# Altium PCB BEAGLEPLAYV020_220915.brd.PcbDoc (part 9 of 12)
Units mil, origin at the board's own origin, x right, y up, seen from the top; angles counter-clockwise.
Board outline 3149.7 x 3149.7 mil, 8 copper layers (TOP, LYR2_GND, LYR3, LAY4_PWR1, LAY5_PWR2, LAY6, LYR7_GND, BOTTOM), stack 60.84 mil thick; 782 components, 546 nets, 2864 pads, 2056 vias.
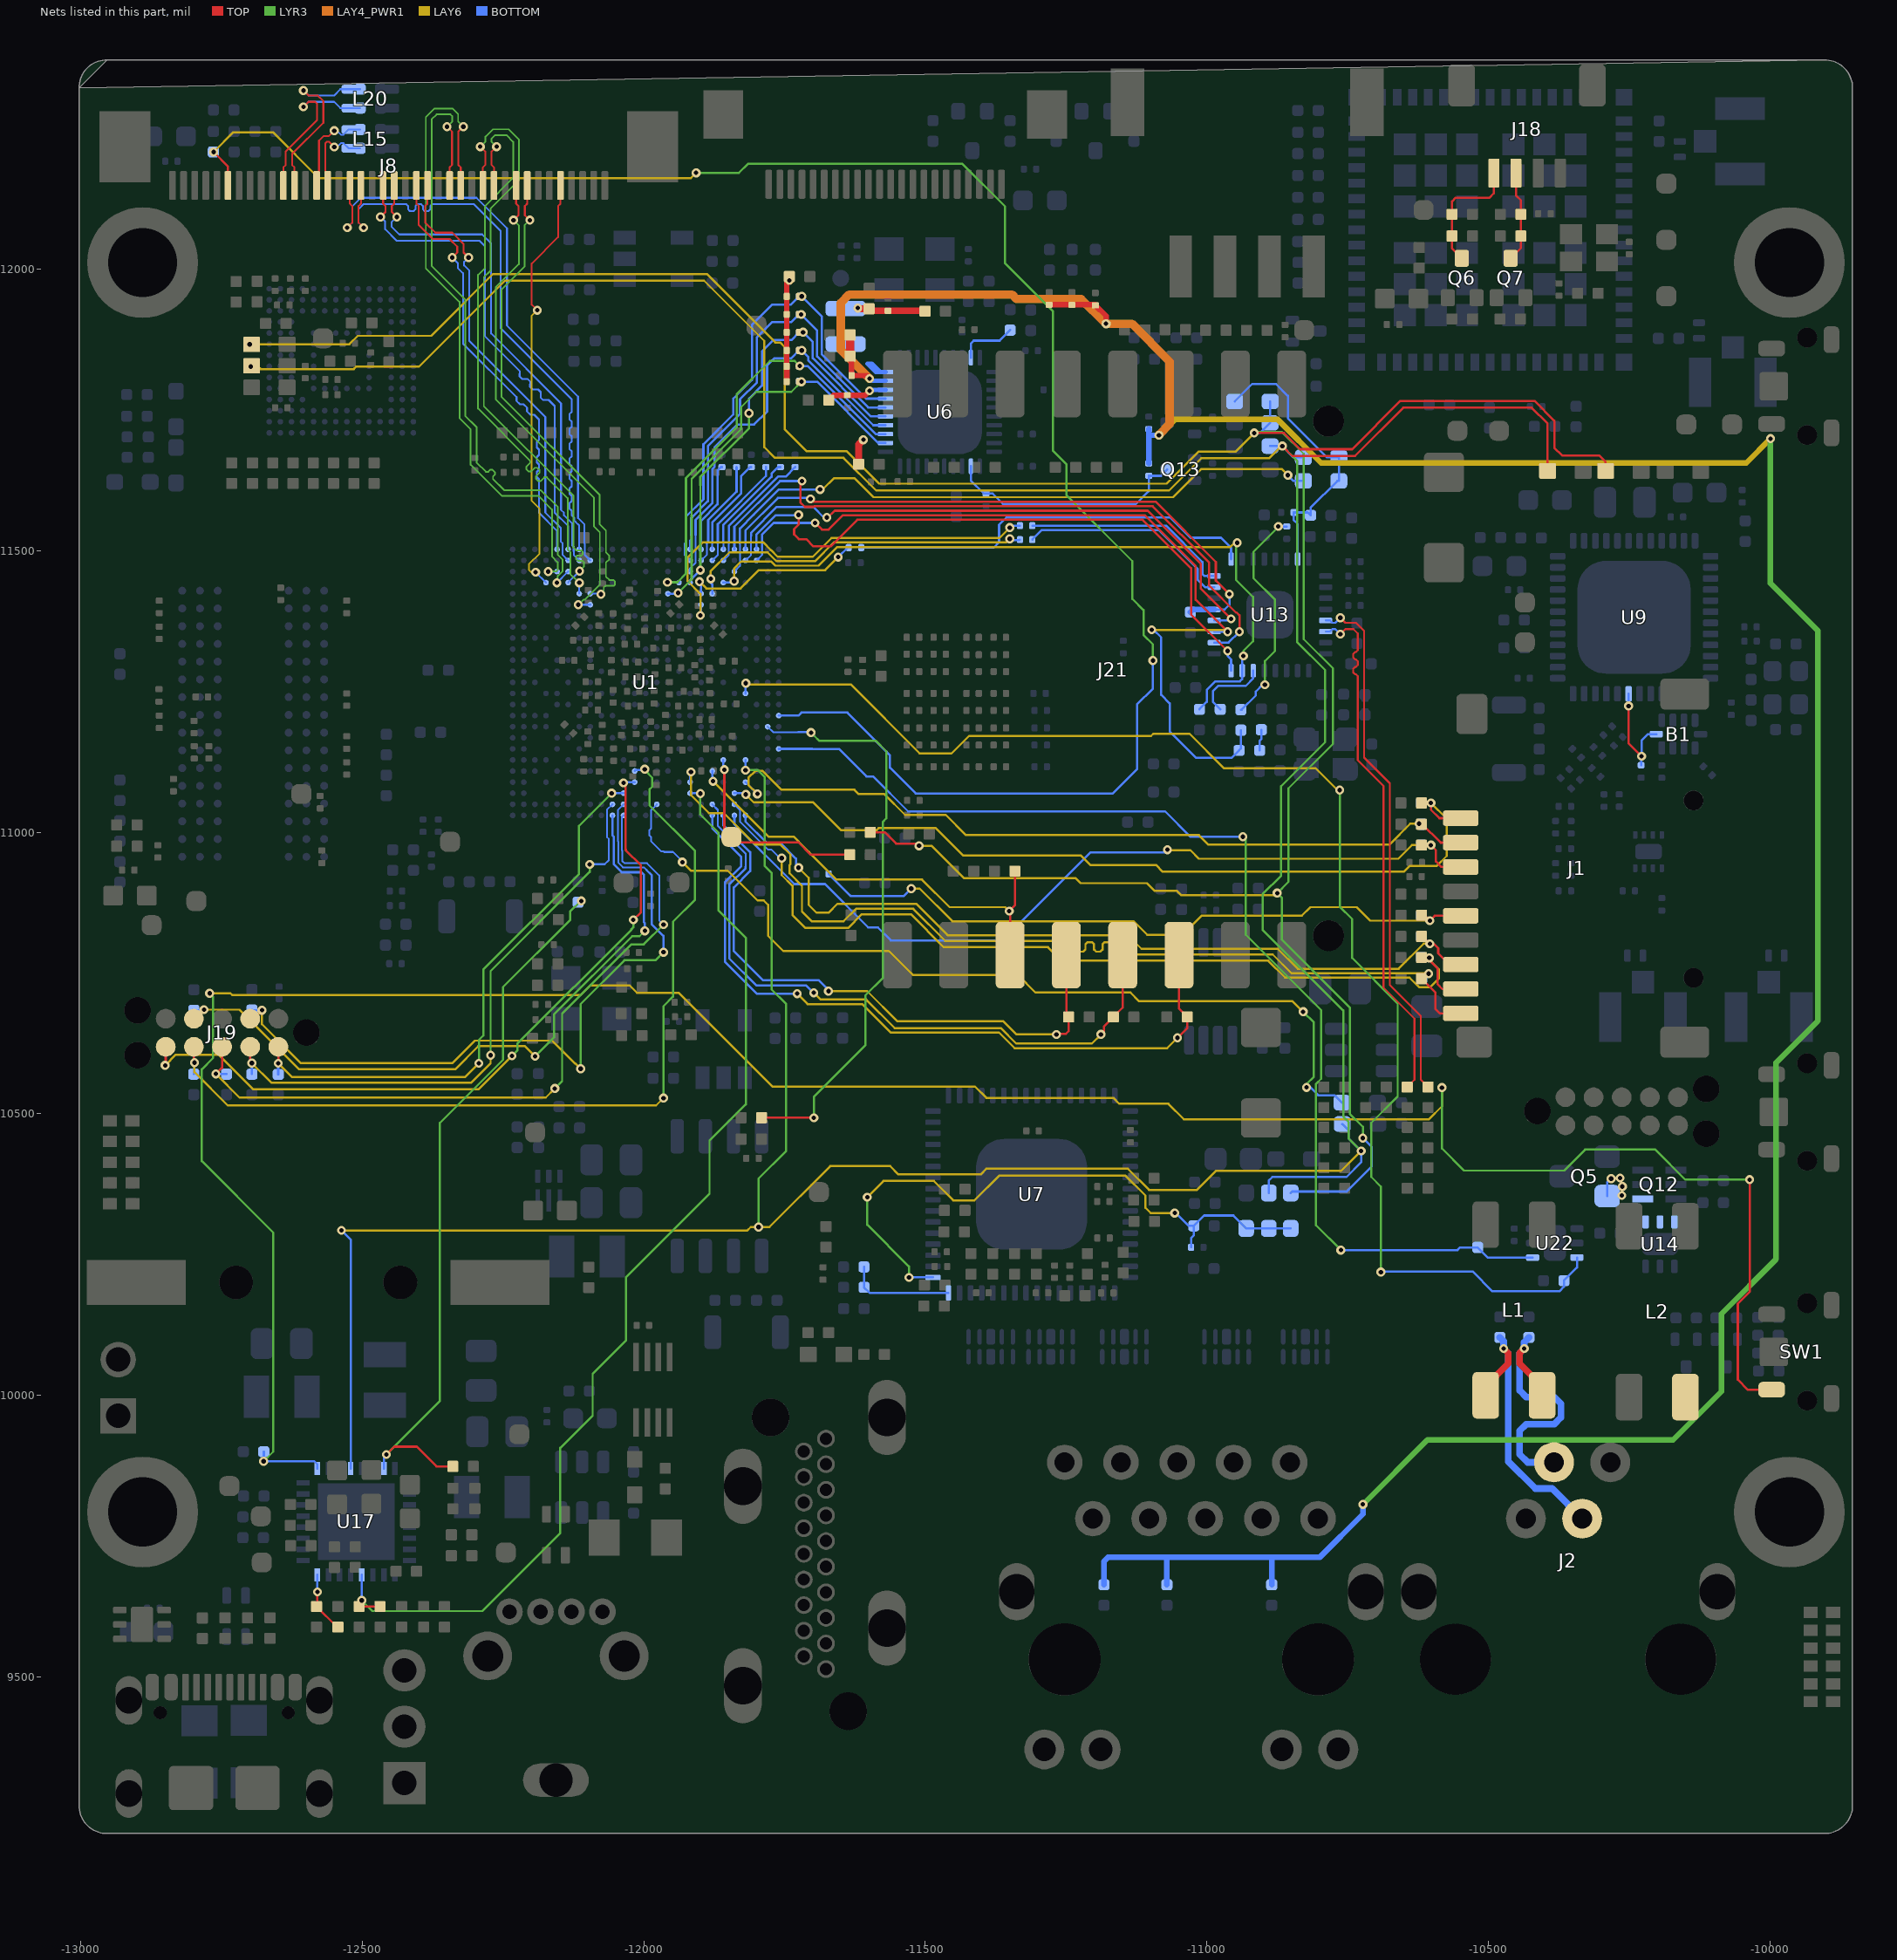
[diagram p15: the nets of this part, all layers, seen from the top]

## Via types
v1: diameter 16/0/16/0/0/0/0/16 (per signal layer), hole 8, TOP to BOTTOM, 334 vias
v2: diameter 16/16/0/0/0/0/16/16 (per signal layer), hole 8, TOP to BOTTOM, 282 vias
v3: diameter 16/0/0/0/0/16/0/16 (per signal layer), hole 8, TOP to BOTTOM, 255 vias
v4: diameter 16/16/0/0/0/16/16/16 (per signal layer), hole 8, TOP to BOTTOM, 253 vias
v5: diameter 16, hole 8, TOP to BOTTOM, 212 vias
v6: diameter 16/16/16/0/0/16/16/16 (per signal layer), hole 8, TOP to BOTTOM, 173 vias
v7: diameter 16/0/0/16/0/0/0/16 (per signal layer), hole 8, TOP to BOTTOM, 131 vias
v8: diameter 16/0/0/0/16/0/0/16 (per signal layer), hole 8, TOP to BOTTOM, 98 vias
v9: diameter 16/16/0/16/0/0/16/16 (per signal layer), hole 8, TOP to BOTTOM, 93 vias
v10: diameter 16/0/16/0/0/16/0/16 (per signal layer), hole 8, TOP to BOTTOM, 87 vias
v11: diameter 16/16/0/16/0/16/16/16 (per signal layer), hole 8, TOP to BOTTOM, 44 vias
v12: diameter 16/16/16/16/0/16/16/16 (per signal layer), hole 8, TOP to BOTTOM, 40 vias
v13: diameter 16/16/16/0/0/0/16/16 (per signal layer), hole 8, TOP to BOTTOM, 19 vias
v14: diameter 16/0/0/16/0/16/0/16 (per signal layer), hole 8, TOP to BOTTOM, 15 vias
v15: diameter 16/0/0/0/16/16/0/16 (per signal layer), hole 8, TOP to BOTTOM, 13 vias
v16: diameter 16/0/16/0/16/0/0/16 (per signal layer), hole 8, TOP to BOTTOM, 3 vias
v17: diameter 16/0/16/16/0/0/0/16 (per signal layer), hole 8, TOP to BOTTOM, 3 vias
v18: diameter 16/16/16/16/0/0/16/16 (per signal layer), hole 8, TOP to BOTTOM, 1 vias

## Nets (pads, with @x,y where several pads share a name; then routed paths per layer and width w, separated by ;. In a path a pad name is that pad's centre, name@x,y a point inside that pad or via, vN(x,y) a via of type N, cw(c..) or ccw(c..) an arc to the next point about the centre after c; other vN are vias at no path point) (continued)
OLDI0_A1_P: J8.5 U1.AB4 | length 765.3
  TOP w3.3: v3(-12189.15,11927.13) -12199,11936.98 -12199,12010 -12152.08,12056.92 -12152.08,12112.11 -12147.88,12116.31 J8.5@-12147.88,12148.55
  LAY6 w3: v3(-12192,11461.7) -12199.7,11461.7 -12204,11466 -12204,11475.95 -12185,11494.95 -12185,11574.7 -12199,11588.7 -12199,11917.28 v3(-12189.15,11927.13)
  BOTTOM w3.2: v3(-12192,11461.7) U1.AB4@-12173.66,11443.36
OLDI0_A2_N: J8.9 U1.Y8 | length 886.2
  TOP w3.3: v1(-12231.28,12086.95) -12222.43,12095.8 -12222.43,12112.12 -12226.62,12116.31 J8.9@-12226.62,12148.55
  LYR3 w3: v1(-12231.28,12086.95) -12221.93,12077.6 -12221.93,12008.64 -12263,11967.57 -12263,11769.13 -12088.49,11594.62 -12088.49,11543.18 -12078,11532.69 -12078,11439.7 -12104.86,11412.84 -12107.46,11412.84 v1(-12116.3,11404)
  BOTTOM w3.3: v1(-12116.3,11404) U1.Y8@-12094.92,11404
OLDI0_A2_P: J8.8 U1.AA8 | length 883.1
  TOP w3.3: J8.8@-12206.94,12148.55 -12206.94,12116.31 -12211.13,12112.12 -12211.13,12095.8 v1(-12202.28,12086.95)
  LYR3 w3: v1(-12202.28,12086.95) -12211.63,12077.6 -12211.63,12004.37 -12252.7,11963.3 -12252.7,11773.4 -12078.19,11598.89 -12078.19,11546.89 -12067.16,11535.86 -12067.16,11497 -12061.16,11491 -12061.16,11485 -12067.16,11479 -12067.16,11454 -12061.16,11448 -12054.12,11448 -12051.12,11445 -12051.12,11439.88 -12053.25,11437.75 -12068.25,11437.75 -12071,11435 -12071,11427.7 v1(-12076,11422.7)
  BOTTOM w3.3: U1.AA8@-12094.92,11423.68 -12076.98,11423.68 v1(-12076,11422.7)
OLDI0_A3_N: J8.12 U1.AB6 | length 1089.6
  TOP w3.3: v1(-12290.34,12217.56) -12281.49,12208.71 -12281.49,12184.99 -12285.68,12180.8 J8.12@-12285.68,12148.55
  LYR3 w3: v1(-12290.34,12217.56) -12280.99,12226.91 -12280.99,12235.43 -12268.12,12248.3 -12239.73,12248.3 -12221.7,12230.27 -12221.7,12157.73 -12271.7,12107.73 -12271.7,11997.73 -12284,11985.43 -12284,11756.71 -12124.81,11597.52 -12124.81,11505.51 -12120,11500.7 -12111.2,11500.7 -12108.87,11498.37 -12108.87,11493.37 -12111,11491.24 -12118,11491.24 -12120,11489.24 -12120,11484.99 -12117.01,11482 -12109,11482 -12106,11479 -12106,11472 -12113.98,11464.02 v1(-12113.98,11463.68)
  BOTTOM w3.3: U1.AB6@-12134.3,11443.36 v1(-12113.98,11463.68)
OLDI0_A3_P: J8.11 U1.AA7 | length 1090.1
  TOP w3.3: J8.11@-12265.99,12148.55 -12265.99,12180.79 -12270.19,12184.99 -12270.19,12208.71 v1(-12261.34,12217.56)
  LYR3 w3: v1(-12261.34,12217.56) -12270.69,12226.91 -12270.69,12231.16 -12263.85,12238 -12244,12238 -12232,12226 -12232,12162 -12282,12112 -12282,12002 -12294.3,11989.7 -12294.3,11752.44 -12201.89,11660.03 -12201.89,11655.79 -12208.72,11648.96 -12208.72,11644.72 -12204.47,11640.47 -12200.23,11640.47 -12193.4,11647.3 -12189.16,11647.3 -12184.91,11643.05 -12184.91,11638.81 -12191.74,11631.98 -12191.74,11627.74 -12187.49,11623.49 -12183.25,11623.49 -12176.42,11630.32 -12172.18,11630.32 -12135.11,11593.25 -12135.11,11502.12 -12130,11497.01 -12130,11457.7 -12124.22,11451.92 -12123.35,11451.92 v1(-12114.51,11443.08)
  BOTTOM w3.3: U1.AA7@-12114.61,11423.68 -12114.61,11442.98 v1(-12114.51,11443.08)
OLDI0_A4_N: J8.15 U1.AC6 | length 1177.9
  TOP w3.3: v1(-12349.39,12253) -12340.54,12244.15 -12340.54,12184.98 -12344.73,12180.79 J8.15@-12344.73,12148.55
  LYR3 w3: v1(-12349.39,12253) -12340.04,12262.35 -12340.04,12271.47 -12343.27,12274.7 -12367.74,12274.7 -12376.7,12265.74 -12376.7,12005.7 -12317,11946 -12317,11739.7 -12297,11719.7 -12297,11656.7 -12280.45,11640.15 -12276.21,11640.15 -12272.8,11643.56 -12268.56,11643.56 -12264.31,11639.31 -12264.31,11635.07 -12267.72,11631.66 -12267.72,11627.42 -12248,11607.7 -12182.99,11607.7 -12152.7,11577.41 -12152.7,11492.69 -12144,11483.99 -12144,11463.7 -12150,11457.7 -12152.65,11455.68 v1(-12154.33,11443.02)
  BOTTOM w3.3: v1(-12154.33,11443.02) U1.AC6@-12134.3,11463.05
OLDI0_A4_P: J8.14 U1.AC5 | length 1176.8
  TOP w3.3: J8.14@-12325.05,12148.55 -12325.05,12180.79 -12329.24,12184.98 -12329.24,12244.15 v1(-12320.39,12253)
  LYR3 w3: v1(-12320.39,12253) -12329.74,12262.35 -12329.74,12275.74 -12339,12285 -12372.01,12285 -12387,12270.01 -12387,12001.43 -12327.3,11941.73 -12327.3,11735.43 -12307.3,11715.43 -12307.3,11652.43 -12252.27,11597.4 -12187.26,11597.4 -12163,11573.14 -12163,11489.7 -12152.79,11479.49 -12152.79,11465.69 -12155.43,11463.05 v1(-12169.65,11463.05)
  BOTTOM w3.3: v1(-12169.65,11463.05) U1.AC5@-12153.98,11463.05
OLDI0_A5_N: J8.18 U1.AE5 | length 792.1
  TOP w3.3: J8.18@-12403.79,12148.55 -12403.79,12116.3 -12399.6,12112.11 -12399.6,12078.31 -12374.69,12053.4 -12344.69,12053.4 -12331.3,12040.01 -12331.3,12029.55 v5(-12340.15,12020.7)
  BOTTOM w3.2: -12186.06,11579.44 -12186.06,11578.69 -12186.01,11578.64 -12186.01,11574.78 -12185.96,11574.73 -12185.96,11567.22 -12153.99,11535.25 -12153.99,11515.24 ; U1.AE5@-12153.98,11502.42 -12153.98,11515.22
  BOTTOM w3.3: v5(-12340.15,12020.7) -12330.3,12010.85 -12330.3,12002.01 -12321,11992.71 -12321,11867.7 -12225.98,11772.68 -12225.98,11765.98 -12219.99,11759.99 -12213.29,11759.99 -12207.3,11754 -12207.3,11747.3 -12201.31,11741.31 -12194.61,11741.31 -12186.06,11732.76 -12186.06,11696.6 -12190,11692.66 -12190,11683.4 -12186.06,11679.46 -12186.06,11670.2 -12190,11666.26 -12190,11657 -12186.06,11653.06 -12186.06,11643.8 -12190,11639.86 -12190,11630.6 -12186.06,11626.66 -12186.06,11579.44
OLDI0_A5_P: J8.17 U1.AD6 | length 796.8
  TOP w3.3: J8.17@-12384.1,12148.55 -12384.1,12116.31 -12388.3,12112.11 -12388.3,12083 -12370,12064.7 -12340,12064.7 -12320,12044.7 -12320,12029.55 v5(-12311.15,12020.7)
  BOTTOM w3.2: -12174.76,11579.44 -12174.76,11567.75 -12147,11539.99 -12147,11515.91 -12144.1,11513.01 -12144.1,11492.54 U1.AD6@-12134.3,11482.74
  BOTTOM w3.3: v5(-12311.15,12020.7) -12319,12012.85 -12319,12006.7 -12309.7,11997.4 -12309.7,11872.39 -12174.76,11737.45 -12174.76,11579.44
OLDI0_A6_N: J8.21 U1.AE6 | length 893.7
  TOP w3.3: v5(-12467.5,12092.6) -12458.65,12101.45 -12458.65,12112.12 -12462.84,12116.31 J8.21@-12462.84,12148.55
  BOTTOM w3.2: -12158.18,11580.95 -12158.18,11580.2 -12158.13,11580.15 -12158.13,11576.29 -12158.08,11576.24 -12158.08,11567.78 -12134.3,11544 U1.AE6@-12134.3,11502.42
  BOTTOM w3.3: v5(-12467.5,12092.6) -12459.3,12084.4 -12459.3,12071.01 -12438.69,12050.4 -12291.69,12050.4 -12282.3,12041.01 -12282.3,11881.01 -12220.37,11819.08 -12220.37,11814.42 -12220.57,11814.22 -12220.57,11809.56 -12215.89,11804.88 -12211.23,11804.88 -12211.03,11805.08 -12206.37,11805.08 -12201.69,11800.4 -12201.69,11795.74 -12201.89,11795.54 -12201.89,11790.88 -12197.21,11786.2 -12192.55,11786.2 -12192.35,11786.4 -12187.69,11786.4 -12183.01,11781.72 -12183.01,11777.06 -12183.21,11776.86 -12183.21,11772.2 -12178.53,11767.52 -12173.87,11767.52 -12173.67,11767.72 -12169.01,11767.72 -12158.18,11756.89 -12158.18,11580.95
OLDI0_A6_P: J8.20 U1.AD7 | length 899.4
  TOP w3.3: J8.20@-12443.16,12148.55 -12443.16,12116.31 -12447.35,12112.12 -12447.35,12101.45 v5(-12438.5,12092.6)
  BOTTOM w3.2: -12146.88,11580.95 -12146.88,11572.42 -12141.8,11567.34 -12141.8,11562.81 -12127,11548.01 -12127,11508.98 -12124.5,11506.48 -12124.5,11498.82 -12124.41,11498.73 -12124.41,11492.54 U1.AD7@-12114.61,11482.74
  BOTTOM w3.3: v5(-12438.5,12092.6) -12448,12083.1 -12448,12075.7 -12434,12061.7 -12287,12061.7 -12271,12045.7 -12271,11885.7 -12146.88,11761.58 -12146.88,11580.95
OLDI0_A7_N: J8.24 U1.AD8 | length 1076.6
  TOP w3.3: v5(-12526.55,12073.54) -12517.7,12082.39 -12517.7,12112.11 -12521.9,12116.31 J8.24@-12521.9,12148.55
  BOTTOM w3.2: -12116.69,11558.02 -12105.8,11547.13 -12105.8,11513.06 -12104.72,11511.98 -12104.72,11492.54 U1.AD8@-12094.92,11482.74
  BOTTOM w3.3: v5(-12526.55,12073.54) -12517.7,12082.39 -12517.7,12111.28 -12502.28,12126.7 -12297,12126.7 -12243,12072.7 -12243,11900 -12116.7,11773.7 -12116.7,11563.24 -12116.69,11558.02
OLDI0_A7_P: J8.23 U1.AE7 | length 1073.3
  TOP w3.3: J8.23@-12502.21,12148.55 -12502.21,12116.3 -12506.4,12112.11 -12506.4,12082.39 v5(-12497.55,12073.54)
  BOTTOM w3.2: -12123.74,11556.37 -12123.74,11553.83 -12121.33,11551.42 -12121.33,11551.34 -12114.61,11544.62 U1.AE7@-12114.61,11502.42
  BOTTOM w3.3: v5(-12497.55,12073.54) -12506.4,12082.39 -12506.4,12106.59 -12497.59,12115.4 -12421.89,12115.4 -12418.59,12112.1 -12418.59,12106.3 -12415.29,12103 -12408.69,12103 -12405.39,12106.3 -12405.39,12112.1 -12402.09,12115.4 -12395.49,12115.4 -12392.19,12112.1 -12392.19,12106.3 -12388.89,12103 -12382.29,12103 -12378.99,12106.3 -12378.99,12112.1 -12375.69,12115.4 -12301.69,12115.4 -12254.3,12068.01 -12254.3,11895.31 -12128,11769.01 -12128,11746.49 -12132,11742.49 -12132,11733.29 -12128,11729.29 -12128,11720.09 -12132,11716.09 -12132,11706.89 -12128,11702.89 -12128,11693.69 -12132,11689.69 -12132,11680.49 -12128,11676.49 -12128,11667.29 -12132,11663.29 -12132,11654.09 -12128,11650.09 -12128,11640.89 -12132,11636.89 -12132,11627.69 -12128,11623.69 -12128,11614.49 -12132,11610.49 -12132,11601.29 -12128,11597.29 -12128,11588.09 -12132,11584.09 -12132,11574.89 -12128,11570.89 -12128,11562.7 -12123.74,11558.44 -12123.74,11556.37
OLDI0_CLK0_N: J8.27 L15.2 R225.2 | length 168.2
  TOP w3.3: J8.27@-12580.95,12148.55 -12580.95,12168.79 -12576.76,12172.98 -12576.76,12228.15 -12568.42,12236.49 -12559.06,12236.49 v5(-12549.75,12245.8)
  BOTTOM w3.3: v5(-12549.75,12245.8) -12544.75,12245.8 -12537.82,12238.87 -12533.14,12238.87 -12523.98,12248.03 L15.2@-12522.04,12248.03 R225.2@-12503.83,12248.03
OLDI0_CLK0_P: J8.26 L15.3 R219.2 | length 149.9
  TOP w3.3: J8.26@-12561.27,12148.55 -12561.27,12168.79 -12565.46,12172.98 -12565.46,12223.46 -12562.81,12226.11 -12559.06,12226.11 v5(-12549.75,12216.8)
  BOTTOM w3.3: v5(-12549.75,12216.8) -12544.75,12216.8 -12537.82,12223.73 -12533.14,12223.73 -12523.98,12214.57 L15.3@-12522.04,12214.57 R219.2@-12503.83,12214.57
OLDI0_CLK1_N: J8.30 L20.3 R265.2 | length 308
  TOP w3.3: J8.30@-12640.01,12148.55 -12640.01,12180.8 -12635.82,12184.99 -12635.82,12209.17 -12580.3,12264.69 -12580.3,12293.76 -12583.6,12297.06 -12595.54,12297.06 v5(-12604.39,12288.21)
  BOTTOM w3.3: v5(-12604.39,12288.21) -12595.54,12297.06 -12549.9,12297.06 -12538.82,12285.98 L20.3@-12521.88,12285.98 R265.2@-12503.67,12285.98
OLDI0_CLK1_P: J8.29 L20.2 R264.2 | length 326.8
  TOP w3.3: J8.29@-12620.32,12148.55 -12620.32,12180.79 -12624.52,12184.99 -12624.52,12204.48 -12569,12260 -12569,12298.45 -12578.91,12308.36 -12595.54,12308.36 v5(-12604.39,12317.21)
  BOTTOM w3.3: v5(-12604.39,12317.21) -12595.54,12308.36 -12549.9,12308.36 -12538.82,12319.44 L20.2@-12521.88,12319.44 R264.2@-12503.67,12319.44
PCADR: R146.2 R147.1 U7.32 | length 190.3
  BOTTOM w4: R146.2@-11608.87,10228.14 -11608.75,10228.02 R147.1@-11608.75,10191.86 -11598.89,10182 U7.32@-11458.87,10182
PHY_DVDD3V3: C91.1 C92.1 FB29.2 R34.1 R37.1 R39.1 R164.1 R262.1 R283.2 R309.2 R311.2 U6.29 | length 5591.8
  TOP w10: C91.1@-11633.58,11845.58 -11631,11843 C92.1@-11631,11811.11 -11604.32,11811.11 v7(-11599,11805.79) ; R283.2@-11280,11936.81 R309.2@-11239.6,11936.81 -11199,11936.81 R311.2@-11198,11935.81 -11179,11916.81 v7(-11179,11903)
  TOP w12: v7(-11599,11805.79) v7@-11598,11806.79
  TOP w15: C91.1@-11633.58,11845.58 -11633.58,11883.19 FB29.2@-11633.52,11883.25
  LYR3 w10: v1(-10722.8,9806.5) -10608.3,9921 -10172,9921 -10086,10007 -10086,10145 -9988.9,10242.1 -9988.9,10591.1 -9915,10665 -9915,11358 -9999,11442 v10(-9999,11699)
  LAY4_PWR1 w15: v7(-11599,11805.79) -11650,11856.79 -11650,11940 -11635,11955 -11346,11955 -11338,11947 -11223,11947 v7(-11179,11903) -11133,11903 -11066,11836 -11066,11725 -11085,11706 v14(-11085,11705)
  LAY6 w10: v14(-11085,11705) -11057,11733 -10874,11733 -10797,11656 -10042,11656 v10(-9999,11699)
  BOTTOM w8: v7(-11599,11805.79) -11594.75,11801.54 U6.29@-11570.59,11801.54
  BOTTOM w10: R39.1@-11182.7,9663.74 -11182.7,9705.3 -11175.62,9712.38 -11071,9712.38 ; R37.1@-11103.15,11655 -11103.15,11706 ; R262.1@-11103.15,11716 -11103.15,11706 ; v14(-11085,11705) -11102.15,11705 -11103.15,11706 ; R164.1@-11070.86,9663.74 -11070.86,9712.24 -11071,9712.38 ; R34.1@-10884.86,9663.74 -10884.86,9710.52 -10883,9712.38 ; v1(-10722.8,9806.5) -10722.8,9789.2 -10799.62,9712.38 -10883,9712.38 ; -11071,9712.38 -10883,9712.38
PHY_VDD1V0: C299.1 C300.1 FB30.2 FB31.1 L19.2 | length 168.6
  TOP w12: v7(-11620,11931) -11618.54,11929.54 C299.1@-11599.87,11929.54 -11596.41,11926.08 C300.1@-11566.13,11926.08 -11501.16,11926.08 FB30.2@-11500.52,11925.44 ; FB31.1@-11618.36,11653.61 -11618.36,11688.64 v7(-11610,11697)
PHY_VDDIO: C95.1 C107.1 R32.1 R42.2 R44.2 R46.2 R48.2 R62.2 R252.2 U6.28 | length 304.4
  TOP w10: R48.2@-11746,11800 -11746,11827.47 R42.2@-11746.14,11827.61 R44.2@-11746.14,11855.61 R46.2@-11746.14,11887.61 R252.2@-11746.14,11919.61 R62.2@-11746.14,11951.61 -11746.14,11982.17 R32.1@-11741.42,11986.89 ; C95.1@-11671.58,11767.39 -11662.97,11776 C107.1@-11638.39,11776 -11607.04,11776 v7(-11599,11784.04)
  TOP w15: v7(-11741.42,11980) R32.1@-11741.42,11986.89
  BOTTOM w8: v7(-11599,11784.04) -11597.21,11785.79 U6.28@-11570.59,11785.79
PHYRSTB: C90.2 Q13.3 R37.2 U6.12 | length 432.1
  BOTTOM w4: U6.12@-11419.01,11649.96 -11419.01,11624.76 -11395.86,11601.61 C90.2@-11392.01,11601.61 -11380.61,11601.61 -11362,11583 -11126,11583 -11103.15,11605.85 R37.2@-11103.15,11633 -11081.56,11633 Q13.3@-11070.56,11644
PMIC_GPIO: R214.2 R215.1 U17.16 | length 109.9
  TOP w4: v5(-12579.59,9651) -12579.59,9626.64 R215.1@-12581.14,9625.09 -12544.76,9588.71 R214.2@-12543.14,9588.71
  BOTTOM w4: v5(-12579.59,9651) U17.16@-12579.59,9681.31
PMIC_LPM_EN0: R227.2 R228.2 U17.31 | length 1291.6
  TOP w4: v1(-12457,9895) -12443,9909 -12403.01,9909 -12368.01,9874 R228.2@-12339.21,9874
  LYR3 w3.8: v1(-12457,9895) -12362,9990 -12362,10484 -12250,10596 -12250,10725 -12131,10844 -12131,10859 -12112,10878 v1(-12111,10878)
  BOTTOM w4: U17.31@-12461.48,9870.29 -12461.48,9890.52 v1(-12457,9895)
PO_5V: L2.4 Q5.2 Q12.4 U14.4 U14.5 U14.6 | length 33.8
  BOTTOM w4: Q5.2@-10289,10354.09 -10289,10378 v5(-10282,10385)
  other v5: -10263,10355 -10262,10371 -10266,10386
PO_EN: R278.1 U1.G25 U22.4 | length 2052.5
  LYR3 w3.8: v1(-10936,10992) -10931,10987 -10931,10818.13 -10797,10684.13 -10797,10562.31 -10806,10553.31 -10806,10302 v1(-10762,10258)
  BOTTOM w4: U1.G25@-11760.28,11148.09 -11700.61,11148.09 -11700.32,11147.8 -11653.24,11147.8 -11604.44,11099 -11592.42,11099 -11530.42,11037 -11074,11037 -11029,10992 v1(-10936,10992) ; v1(-10762,10258) -10555,10258 -10550.21,10262.79 R278.1@-10519,10262.79 -10501.18,10244.97 U22.4@-10421.37,10244.97
PO_OCN: R207.2 U1.M22 U22.3 | length 2510.6
  LYR3 w3.8: v10(-10764,11075) -10764,10868 -10742,10846 -10742,10777 -10661.1,10696.1 -10661.1,10530.9 -10708,10484 -10708,10388 -10691,10371 v1(-10691,10219)
  LAY6 w3.8: -11697,11262.55 -11632.54,11262.55 -11509.99,11140 -11504.22,11140 -11504.18,11139.96 -11453.35,11139.96 -11422.31,11171 -11099,11171 -11095,11175 -11030.99,11175 -10969.99,11114 -10807,11114 -10768,11075 v10(-10764,11075)
  LAY6 w4: v3(-11818.77,11264.61) -11816.71,11262.55 -11697,11262.55
  BOTTOM w4: U1.M22@-11819.34,11246.52 -11819.34,11264.04 v3(-11818.77,11264.61) ; v1(-10691,10219) -10690,10220 -10528,10220 -10493,10185 -10374,10185 -10365.79,10193.21 R207.2@-10365.79,10203.84 -10342.63,10227 U22.3@-10342.63,10244.97
PORZ_OUT: D11.2 D33.2 D34.2 D47.2 D59.2 R149.2 | length 5389
  TOP w4: v3(-12700,11866.36) D47.2@-12696.48,11866.36 ; R149.2@-11597.79,10999.95 -11571.95,10999.95 -11552,10980 -11515,10980 v3(-11511,10976) ; v10(-10916,11709) -10863,11709 -10834.22,11680.22 -10741.98,11680.22 -10656.2,11766 -10418.02,11766 -10382.8,11730.78 -10382.8,11682.8 -10369,11669 -10303,11669 -10291.72,11657.72 D11.2@-10291.72,11641.65 D11.2@-10293,11642.93
  LYR3 w3.8: v10(-10916,11709) -10914.37,11710.63 -10866.63,11710.63 -10828,11672 -10828,11343 -10776,11291 -10776,11157 -10855,11078 -10855,10912 v10(-10875,10892) -10867,10884 -10867,10809.59 -10746,10688.59 -10746,10500 -10723,10477 v1(-10723,10457)
  LAY6 w3.8: v3(-12700,11866.36) -12567,11866.36 -12566.76,11866.6 -12522.76,11866.6 -12507.76,11881.6 -12377.4,11881.6 -12267.7,11991.3 -11887.96,11991.3 -11766.56,11869.9 -11757.88,11869.9 -11749.74,11861.76 -11749.74,11715.74 -11711,11677 -11640,11677 -11582,11619 -11071.69,11619 -11014.89,11675.8 -10949.2,11675.8 v10(-10916,11709) ; v3(-11511,10976) -11488.78,10976 -11431.58,10918.8 -11233.42,10918.8 -11224.22,10909.6 -11106.6,10909.6 -11093.2,10896.2 -11053.51,10896.2 -11045.31,10888 -10879,10888 v10(-10875,10892)
  BOTTOM w4: v10(-10916,11709) -10905.65,11709 D33.2@-10887.65,11727 D34.2@-10887.65,11765 ; D59.2@-10851,10359.5 -10848.5,10362 -10752,10362 -10707,10407 -10707,10441 v1(-10723,10457)
PSE_N: C16.1 J2.4 L1.3 | length 503
  TOP w12: L1.3@-10504.66,10000.07 -10504.66,10016.41 -10464.66,10056.41 -10464.66,10075 v5(-10472.99,10083.33)
  BOTTOM w12: C16.1@-10479.67,10102.93 -10472.99,10096.25 v5(-10472.99,10083.33) -10464.66,10075 -10464.66,9882.66 -10416.76,9834.76 -10386.98,9834.76 J2.4@-10333.42,9781.2
PSE_P: C17.1 J2.3 L1.4 | length 503.9
  TOP w12: v5(-10436.33,10083.33) -10444.66,10075 -10444.66,10056.41 -10404.66,10016.41 L1.4@-10404.66,10000.07
  BOTTOM w12: C17.1@-10428.01,10102.93 -10436.33,10094.61 v5(-10436.33,10083.33) -10444.66,10075 -10444.66,10009.03 -10432.66,9997.03 -10383,9997.03 -10371,9985.03 -10371,9961.03 -10383,9949.03 -10432.66,9949.03 -10444.66,9937.03 -10444.66,9895.66 -10430.2,9881.2 J2.3@-10383.42,9881.2
PWR_BTN: R161.2 SW1.2 U17.25 | length 4501
  TOP w4: v1(-10036,10383.2) -10036,10184 -10057,10163 -10057,10028 -10039,10010 -9997.36,10010 SW1.2@-9996.99,10010.37
  LYR3 w3.8: v10(-12771,10714) -12765,10708 -12765,10599 -12785,10579 -12785,10416 -12658,10289 -12658,9900 v1(-12675,9883) ; v10(-10582.5,10546.54) -10582.5,10438.5 -10543.2,10399.2 -10365.52,10399.2 -10328.12,10436.6 -10203.64,10436.6 -10150.24,10383.2 v1(-10036,10383.2)
  LAY6 w3.8: v10(-12771,10714) -12734,10714 -12731.2,10711.2 -12111.8,10711.2 -12095,10728 -12025,10728 -12012.1,10715.1 -11938.22,10715.1 -11771.72,10548.6 -11411.96,10548.6 -11391.68,10528.32 -11166.17,10528.32 -11155.65,10517.8 -11068.32,10517.8 -11040.92,10490.4 -10605.6,10490.4 -10582.5,10513.5 v10(-10582.5,10546.54)
  BOTTOM w4: R161.2@-12674.79,9900 -12674.79,9883.21 v1(-12675,9883) -12585,9883 -12579.59,9877.59 U17.25@-12579.59,9870.29
QWIIC_SCL: D30.2 J18.4 Q6.3 R255.2 | length 224.6
  TOP w4: Q6.3@-10547.15,12019.2 -10564.55,12036.6 R255.2@-10564.55,12058.86 D30.2@-10564.55,12097.34 -10564.55,12120.45 -10558,12127 -10498,12127 -10490.29,12134.71 J18.4@-10490.29,12170.66
QWIIC_SDA: D29.2 J18.3 Q7.3 R254.2 | length 162.6
  TOP w4: Q7.3@-10460.5,12019.2 -10442.29,12037.41 R254.2@-10442.29,12058.86 D29.2@-10442.29,12097.34 -10442.29,12122.29 -10450.92,12130.92 J18.3@-10450.92,12170.66
REGOUT: L19.1 U6.30 | length 66.5
  BOTTOM w8: U6.30@-11570.59,11817.29 U6.30@-11580.29,11817.29 ; U6.30@-11580.29,11817.29 -11595,11832 -11602.58,11832 -11587.87,11817.29 U6.30@-11580.29,11817.29
RESET_REQZ: R122.2 TP2.1 U1.F20 | length 365.8
  TOP w4: v5(-11856.9,11111.2) -11856.9,11004.27 TP2.1@-11844.21,10991.58 -11834.63,10982 -11725,10982 -11703.21,10960.21 R122.2@-11634.21,10960.21
  BOTTOM w4: U1.F20@-11858.7,11128.4 -11858.7,11113 v5(-11856.9,11111.2)
RESETN: C274.1 D35.1 D58.1 D59.1 R150.2 U7.33 | length 1119
  LYR3 w3.8: v10(-11603,10352) -11603,10303 -11529,10229 v1(-11529,10209.56)
  LAY6 w3.8: v10(-11603,10352) -11574.29,10380.71 -11484.71,10380.71 -11450.37,10346.37 -11412.63,10346.37 -11368.4,10390.6 -11144.98,10390.6 -11109,10354.62 -11109,10333 -11099.9,10323.9 v3(-11057,10323.9)
  BOTTOM w4: v1(-11529,10209.56) U7.33@-11486.43,10209.56 ; v3(-11057,10323.9) -11055,10323.9 -11032.1,10301 R150.2@-11023.21,10301 ; C274.1@-11028,10263 -11028,10279.36 -11023.21,10284.15 R150.2@-11023.21,10301 ; D59.1@-10851,10296.5 D35.1@-10890,10296.5 D58.1@-10930,10296.5 -10952.92,10319.42 -11004.76,10319.42 R150.2@-11023.21,10301
RESETSTATZ: D12.2 D35.2 D46.2 D48.2 D51.2 D54.2 U1.F22 U17.28 | length 7793.1
  TOP w4: v3(-12697.95,11826.95) D48.2@-12696.48,11828.42 ; v10(-10865.85,11685.85) -10848.22,11668.22 -10737,11668.22 -10651.22,11754 -10423,11754 -10394.8,11725.8 D12.2@-10394.8,11641.65
  LYR3 w3.8: v1(-11819.34,11110.25) -11797.25,11110.25 -11785,11098 -11785,10940 -11773,10928 -11773,10721 -11747,10695 -11747,10434 -11796,10385 v10(-11796,10299) ; v10(-10865.85,11685.85) -10839.8,11659.8 -10839.8,11338.11 -10790,11288.26 -10790,11160 -10868,11082 -10868,10923 -10901,10890 -10901,10826.9 -10757.8,10683.7 -10757.8,10495.11 -10748.04,10485.35 -10748.04,10456.04 v10(-10726,10434)
  LAY6 w3.8: v3(-12697.95,11826.95) -12684.55,11826.95 -12680.26,11822.66 -12515.15,11822.66 -12510.81,11827 -12399,11827 -12246.5,11979.5 -11892.85,11979.5 -11786,11872.65 -11786,11684 -11767,11665 -11645.31,11665 -11587.31,11607 -11067,11607 -11010,11664 -10889.85,11664 -10868,11685.85 v10(-10865.85,11685.85) ; v3(-12537,10293) -11816,10293 -11810,10299 v10(-11796,10299) -11776.82,10299 -11668.82,10407 -11562.15,10407 -11547.66,10392.51 -11401.76,10392.51 -11391.87,10402.4 -11140.09,10402.4 -11102.65,10364.96 -11017.35,10364.96 -10983.31,10399 -10761,10399 v10(-10726,10434)
  BOTTOM w4: v3(-12537,10293) -12520.53,10276.53 U17.28@-12520.53,9870.29 ; v1(-11819.34,11110.25) U1.F22@-11819.34,11128.4 ; D35.2@-10890,10359.5 -10890,10381.5 -10883.5,10388 -10752,10388 -10726,10414 v10(-10726,10434) -10748.04,10456.04 -10748.04,10470.52 D51.2@-10759.47,10481.95 ; D54.2@-10887.65,11685.85 v10(-10865.85,11685.85) -10845.85,11665.85 D46.2@-10828.48,11665.85
RGMII1_RD0: R45.2 R46.1 U1.AB17 U6.25 | length 768.8
  LYR3 w3.8: -11899.5,11562.7 -11899.5,11616.5
  LYR3 w4: v1(-11899.5,11465.5) -11899.5,11562.7 ; -11899.5,11616.5 -11899.5,11631.18 -11813,11717.68 v1(-11813,11744)
  BOTTOM w4: U1.AB17@-11917.76,11443.36 -11917.76,11447.24 v1(-11899.5,11465.5) ; v1(-11813,11744) -11813,11770 -11790,11793 -11790,11854 -11770,11874 -11737.75,11874 R45.2@-11724.14,11887.61 ; v5(-11717,11888) -11700,11871 -11700,11841.72 -11596.83,11738.55 U6.25@-11570.59,11738.55
RGMII1_RD1: R43.2 R44.1 U1.AC17 U6.24 | length 720
  BOTTOM w3.2: U1.AC17@-11917.76,11463.05 -11917.76,11468.88 -11907.96,11478.68 -11907.96,11528
  BOTTOM w4: -11907.96,11528 -11907.96,11554.7 -11878,11584.66 -11878,11645 -11874.39,11648.61 -11874.39,11683.61 -11834,11724 -11804,11724 -11781,11747 -11781,11829 -11768,11842 -11737.75,11842 R43.2@-11724.14,11855.61 v5(-11719.39,11855.61) -11708,11844.22 -11708,11838.4 -11592.4,11722.8 U6.24@-11570.59,11722.8
RGMII1_RD2: R41.2 R42.1 U1.AB16 U6.23 | length 758.9
  LYR3 w3.8: -11835,11719 -11835,11778 -11776,11837 -11732,11837 v1(-11723,11828)
  LYR3 w4: v1(-11958,11444) -11940.15,11444 -11925,11459.15 -11925,11629 -11835,11719
  BOTTOM w4: v1(-11958,11444) -11957.36,11443.36 U1.AB16@-11937.44,11443.36 ; v1(-11723,11828) -11708.92,11828 -11587.97,11707.05 U6.23@-11570.59,11707.05
RGMII1_RD3: R47.2 R48.1 U1.AA15 U6.22 | length 719.1
  TOP w4: R48.1@-11724,11800 v1(-11720,11800)
  LYR3 w3.8: -11915,11562.7 -11915,11627.82 -11827.09,11715.73 -11827.09,11754.91 -11800,11782 -11738,11782 v1(-11720,11800)
  LYR3 w4: v1(-11939,11425) -11915,11449 -11915,11562.7
  BOTTOM w4: U1.AA15@-11957.13,11423.68 -11940.32,11423.68 v1(-11939,11425) ; v1(-11720,11800) -11692.24,11800 -11583.54,11691.3 U6.22@-11570.59,11691.3
RGMII1_RX_CTL: R249.2 R252.1 U1.AE17 U6.26 | length 766.5
  BOTTOM w3.2: U1.AE17@-11917.76,11502.42 -11917.76,11518.24 -11916,11520 -11916,11529
  BOTTOM w4: -11916,11529 -11916,11557.98 -11886,11587.98 -11886,11685.68 -11829,11742.68 -11829,11769 -11799,11799 -11799,11879 -11772,11906 -11737.75,11906 R249.2@-11724.14,11919.61 v5(-11720.39,11919.61) -11692,11891.22 -11692,11845.04 -11601.25,11754.29 U6.26@-11570.59,11754.29
RGMII1_RXC: R61.2 R62.1 U1.AD17 U6.27 | length 844.8
  BOTTOM w3.2: -11924.64,11527.36 -11924.64,11515.39 -11927.56,11512.47 -11927.56,11492.54 U1.AD17@-11917.76,11482.74
  BOTTOM w4: -11924.64,11527.36 -11924.64,11560.66 -11894.01,11591.29 -11894.01,11688.99 -11841,11742 -11841,11770 -11808,11803 -11808,11901 -11772,11937 -11738.75,11937 R61.2@-11724.14,11951.61 v5(-11719.39,11951.61) -11684,11916.22 -11684,11849 -11605.04,11770.04 U6.27@-11570.59,11770.04
RGMII1_TD0: R51.1 U1.AE20 | length 190.9
  BOTTOM w3.2: -11859,11515.7 -11858.7,11515.4 U1.AE20@-11858.7,11502.42
  BOTTOM w4: -11859,11515.7 -11859,11545.38 -11773,11631.38 -11773,11637 -11761.54,11648.46 R51.1@-11757.14,11648.46
RGMII1_TD1: R52.1 U1.AD20 | length 226.5
  BOTTOM w3.2: U1.AD20@-11858.7,11482.74 -11849,11492.44 -11849,11498.26 -11848.9,11498.36 -11848.9,11506.48 -11849,11506.58 -11849,11513.7
  BOTTOM w4: -11849,11513.7 -11849,11544.06 -11761.36,11631.7 -11747.9,11631.7 R52.1@-11731.14,11648.46
RGMII1_TD2: R57.1 U1.AE18 | length 162.4
  BOTTOM w4: U1.AE18@-11898.08,11502.42 -11898.08,11553.26 -11868.93,11582.41 -11868.93,11642.42 -11862.89,11648.46 R57.1@-11861.14,11648.46
RGMII1_TD3: R58.1 U1.AD18 | length 191.8
  BOTTOM w3.2: U1.AD18@-11898.08,11482.74 -11888.19,11492.63 -11888.19,11512.51
  BOTTOM w4: -11888.19,11512.51 -11885.59,11515.11 -11885.59,11554.43 -11835.14,11604.88 R58.1@-11835.14,11648.46
RGMII1_TX_CTL: R50.1 U1.AD19 | length 205.2
  BOTTOM w3.2: U1.AD19@-11878.39,11482.74 -11868.5,11492.63 -11868.5,11513.2
  BOTTOM w4: -11868.5,11513.2 -11868.5,11547.2 -11783.14,11632.56 R50.1@-11783.14,11648.46
RGMII1_TXC: R49.1 U1.AE19 | length 175.7
  BOTTOM w3.2: U1.AE19@-11878.39,11502.42 -11878.39,11513.7
  BOTTOM w4: -11878.39,11513.7 -11878.39,11550.31 -11827.14,11601.56 -11827.14,11632.21 -11810.89,11648.46 R49.1@-11809.14,11648.46
RMII2_CRS_DV: U1.AE21 U13.18 | length 1202.7
  TOP w4: v5(-11719,11623.7) -11722,11620.7 -11722,11586 -11714,11578 -11698.2,11578 -11697.2,11579 -11096,11579 -10996,11479 -10996,11438 -10948.15,11390.15 -10947.16,11390.15 -10942.13,11385.12 v5(-10942.13,11356)
  BOTTOM w4: U1.AE21@-11839.02,11502.42 -11839.02,11542.72 -11758.04,11623.7 v5(-11719,11623.7) ; U13.18@-10987,11336.75 -10961.38,11336.75 v5(-10942.13,11356)
RMII2_REF_CLK: R223.2 R231.2 U1.AD23 U13.19 | length 1569.8
  TOP w4: v5(-11695.68,11549.3) -11683.73,11537.35 -11671.65,11537.35 -11646,11563 -11110,11563 -11020,11473 -11020,11413 v3@-10965,11358 ; v3(-10963,11356) v3@-10965,11358 ; v3@-10962.13,11356.46 -10962.13,11356.58 -10965,11359.45 v3@-10965,11358
  LAY6 w3.8: v3(-11098,11359.5) -10966.5,11359.5 v3(-10963,11356)
  BOTTOM w3.2: U1.AD23@-11799.65,11482.74 -11789.85,11492.54 -11789.85,11506.48 -11790.16,11506.79 -11790.16,11507.36
  BOTTOM w4: -11790.16,11507.36 -11790.16,11528.36 -11769.22,11549.3 v5(-11695.68,11549.3) ; v3(-11098,11359.5) -11094.5,11359.5 -11081,11346 -11081,11244 -11066,11229 -11066,11179 -11019,11132 -10956,11132 -10942.65,11145.35 R231.2@-10942.65,11145.5 -10939.5,11148.65 R223.2@-10939.5,11181.35 ; U13.19@-10987,11356.45 -10963.45,11356.45 v3(-10963,11356)
RMII2_REF_CLK1: R98.2 R223.1 | length 402.3
  LYR3 w3.8: v1(-10897,11262) -10897,11304 -10879,11322 -10879,11413 -10917,11451 -10917,11498 -10873.04,11541.96 v1(-10873.04,11543.04)
  BOTTOM w4: R223.1@-10939.5,11217.77 -10938.23,11217.77 -10913,11243 -10913,11250 -10901,11262 v1(-10897,11262) ; v1(-10873.04,11543.04) R98.2@-10858.14,11543.04
RMII2_REF_CLK2: R224.1 R231.1 | length 37.9
  BOTTOM w4: R231.1@-10906.23,11145.5 -10906.23,11162.35 -10903.29,11165.29 R224.1@-10903.29,11182.14
RMII2_RX_ER: U1.AD22 U13.20 | length 1078.3
  TOP w4: v5(-11675,11559) v5@-11673,11559 ; v5@-11670,11556 v5@-11673,11559 ; v5(-10957,11379) -11011,11433 -11011,11477 -11105,11571 -11661,11571 v5@-11673,11559
  BOTTOM w3.2: U1.AD22@-11819.34,11482.74 -11809.54,11492.54 -11809.54,11526.55
  BOTTOM w4: -11809.54,11526.55 -11809.54,11531.85 -11763.69,11577.7 -11707.41,11577.7 -11707.21,11577.9 -11698.9,11577.9 -11680,11559 v5(-11675,11559) ; U13.20@-10987,11376.15 -10959.85,11376.15 v5(-10957,11379)
RMII2_RXD0: U1.AE23 U13.16 | length 1136.1
  TOP w4: v5@-11724.12,11563.88 -11724.3,11563.7 v5(-11725,11563.7) -11725,11546.37 -11733,11538.37 -11733,11529.03 -11724.47,11520.5 -11711.5,11520.5 -11698.7,11507.7 -11668,11507.7 -11620.7,11555 -11114,11555 -11028,11469 -11028,11387 v5(-10963,11322) v5@-10964,11322
  BOTTOM w4: U1.AE23@-11799.65,11502.42 -11799.65,11529.06 -11765.71,11563 -11725.7,11563 v5(-11725,11563.7) ; v5(-10963,11322) -10963,11313 -10956.95,11306.95 U13.16@-10956.95,11287
RMII2_RXD1: R114.1 U1.AB20 U13.15 | length 1335.4
  LYR3 w3.8: v10(-10946,11514) -10948,11512 -10948,11448 -10918,11418 -10918,11339 -10935,11322 v1(-10935,11313)
  LAY6 w3.8: v3(-11839.36,11446) -11839.36,11468.64 -11827,11481 -11773.95,11481 -11766.35,11473.4 -11689.6,11473.4 -11657,11506 -10959,11506 -10951,11514 v10(-10946,11514)
  BOTTOM w4: U1.AB20@-11858.7,11443.36 -11842,11443.36 v3(-11839.36,11446) ; R114.1@-11013.14,11218.41 -11000,11231.55 -11000,11253 -10985,11268 -10941.25,11268 -10937.25,11272 U13.15@-10937.25,11287 -10937.25,11310.75 v1(-10935,11313)
RMII2_TX_EN: R97.2 U1.AA19 | length 628.5
  LAY6 w3.8: v3(-11881,11450) -11881,11463.99 -11847.99,11497 -11780.05,11497 -11764.25,11481.2 -11695.8,11481.2 -11662.2,11514.8 -11356.2,11514.8 v3(-11350,11521)
  BOTTOM w4: v3(-11881,11450) -11881,11443 -11878.39,11440.39 U1.AA19@-11878.39,11423.68 ; v3(-11350,11521) -11348.44,11521 -11346,11518.56 -11333,11518.56 R97.2@-11332,11519.56
RMII2_TXD0: R96.2 U1.Y18 | length 766.5
  LAY6 w3.8: v3(-11899.38,11385.23) -11899.38,11423.26 -11922.1,11445.98 -11922.1,11487.89 -11894.99,11515 -11788,11515 -11774,11501 ; -11700,11489 -11666.4,11522.6 -11368.4,11522.6 v3(-11350,11541)
  LAY6 w4: -11774,11501 -11762,11489 -11700,11489
  BOTTOM w4: v3(-11899.38,11385.23) -11898.08,11386.53 U1.Y18@-11898.08,11404 ; v3(-11350,11541) -11346.44,11544.56 R96.2@-11332,11544.56
RMII2_TXD1: R95.2 U1.AA18 | length 322.5
  LAY6 w3.8: -11697,11465.6 -11677.74,11465.6 v3(-11654.67,11488.67)
  LAY6 w4: v3(-11901,11445) -11888.8,11432.8 -11828.2,11432.8 -11795.4,11465.6 -11697,11465.6
  BOTTOM w4: v3(-11901,11445) -11900.01,11443 -11899.64,11442.88 -11898.4,11440.4 -11898.08,11440.08 U1.AA18@-11898.08,11423.68 ; v3(-11654.67,11488.67) -11637.78,11505.56 R95.2@-11635.92,11505.56
RSET: R33.1 U6.39 | length 104.6
  BOTTOM w4: U6.39@-11419.01,11842.88 -11419.01,11867.99 -11414,11873 -11368.08,11873 R33.1@-11349.33,11891.75
RST_N_N: C236.1 D34.1 D46.1 D53.1 R111.2 U13.31 | length 518.7
  BOTTOM w4: D34.1@-10950.65,11765 -10919.65,11796 -10877,11796 -10856,11775 -10856,11735 -10786.85,11665.85 D46.1@-10765.48,11665.85 D53.1@-10765.48,11624 -10768,11624 -10815.89,11576.11 R111.2@-10815.89,11562.86 -10820.89,11567.86 C236.1@-10845.98,11567.86 -10845.98,11554.61 -10838.75,11547.38 U13.31@-10838.75,11485
RTC_INT: R163.1 U1.J24 | length 1026
  TOP w3.8: -11721,10493 v1(-11697.9,10493)
  TOP w4: R163.1@-11790.79,10493 -11721,10493
  LYR3 w3.8: v1(-11697.9,10493) -11697.9,10530.36 -11606.5,10621.76 -11606.5,10710.14 -11575.2,10741.44 -11575.2,11018.8 -11569.1,11024.9 -11569.1,11143.89 -11587.96,11162.75 -11688.76,11162.75 -11697,11170.99
  LYR3 w4: v1(-11703,11177) -11697,11170.99
  BOTTOM w3.2: U1.J24@-11779.96,11187.46 -11770.16,11177.66 -11725.66,11177.66
  BOTTOM w4: -11725.66,11177.66 -11703.66,11177.66 v1(-11703,11177)
RX/TX: B1.5 C18.1 U9.7 | length 195.6
  TOP w4: v5(-10251.06,11224.17) -10251.06,11158.06 v5(-10228,11135)
  BOTTOM w4: v5(-10251.06,11224.17) U9.7@-10251.06,11245.95 ; C18.1@-10228.64,11119.05 -10228.64,11134.36 v5(-10228,11135) -10228,11163 -10216.66,11174.34 B1.5@-10201.85,11174.34
RX_N: R103.1 U13.6 | length 938.2
  TOP w3.3: v5(-10762.95,11351.8) -10754.1,11360.65 -10739.65,11360.65 -10732,11353 -10732,11323.37 -10735.3,11320.07 -10736.7,11320.07 -10740,11316.77 -10740,11310.17 -10736.7,11306.87 -10735.3,11306.87 -10732,11303.57 -10732,11296.97 -10735.3,11293.67 -10736.7,11293.67 -10740,11290.37 -10740,11283.77 -10736.7,11280.47 -10735.3,11280.47 -10732,11277.17 -10732,11128.01 -10686.3,11082.31 -10686.3,10724.31 -10631.29,10669.3 -10631.29,10560.5 R103.1@-10644.14,10547.65
  BOTTOM w3.3: U13.6@-10789,11356.45 -10781.44,11356.45 -10777.24,11360.65 -10771.8,11360.65 v5(-10762.95,11351.8)
RX_P: R102.1 U13.5 | length 940.4
  TOP w3.3: v5(-10762.95,11380.8) -10754.1,11371.95 -10734.96,11371.95 -10720.7,11357.69 -10720.7,11132.7 -10675,11087 -10675,10729 -10619.99,10673.99 -10619.99,10560.5 R102.1@-10607.14,10547.65
  BOTTOM w3.3: U13.5@-10789,11376.15 -10781.44,11376.15 -10777.24,11371.95 -10771.8,11371.95 v5(-10762.95,11380.8)
SD_CD: D18.2 J1.9 R21.2 U1.D17 | length 1789.5
  TOP w4: v3(-10606,10749) -10614.96,10740.04 D18.2@-10618.79,10740.04 -10594,10715.25 -10594,10686 -10586.48,10678.48 J1.9@-10549,10678.48
  LAY6 w3.8: v3(-11916.1,11107.17) -11916.1,11065.8 -11884.3,11034 -11858,11034 -11802,10978 -11757,10978 -11739.48,10960.48 -11739.48,10943.6 -11741,10942.08 -11741,10927 -11719,10905 -11719,10859 -11702,10842 -11645,10842 -11623,10864 -11521.36,10864 -11464.36,10807 -11274,10807 -11255,10788 -11219.4,10788 -11215.6,10791.8 -11215.6,10801.2 -11211.8,10805 -11204.2,10805 -11200.4,10801.2 -11200.4,10791.8 -11196.6,10788 -11189,10788 -11185.2,10791.8 -11185.2,10801.2 -11181.4,10805 -11173.8,10805 -11170,10801.2 -11170,10791.8 -11166.2,10788 -11158.6,10788 -11154.8,10791.8 -11154.8,10801.2 -11151,10805 -11143.4,10805 -11139.6,10801.2 -11139.6,10789.6 -11133,10783 -10883,10783 -10849.8,10749.8 -10606.8,10749.8 v3(-10606,10749)
  BOTTOM w4: U1.D17@-11917.76,11089.04 -11917.76,11104.71 -11916.1,11106.37 v3(-11916.1,11107.17) ; R21.2@-10618.21,10740.96 -10614.04,10740.96 v3(-10606,10749)
SD_CLK: D14.2 J1.5 R75.2 R80.2 | length 1249.6
  TOP w4: D14.2@-10618.79,10852.76 -10613.76,10852.76 v3(-10604,10843) -10595.3,10851.7 J1.5@-10549,10851.7
  LAY6 w3.8: v3(-11525,10900) -11510,10900 -11452,10842 -11130,10842 -11106,10818 -11043,10818 -11009,10852 -10831,10852 -10816,10867 -10734,10867 -10710,10843 v3(-10604,10843)
  BOTTOM w4: R80.2@-11671.7,10926 -11632.87,10887.17 -11612.07,10887 -11538,10887 v3(-11525,10900) ; R75.2@-10618.79,10852.76 -10613.76,10852.76 v3(-10604,10843)
SD_CMD: D15.2 J1.3 R78.2 U1.A21 | length 1535.6
  TOP w4: D15.2@-10618.79,10977.14 v3(-10602.08,10977.14) -10593,10968.06 -10593,10948 -10583.32,10938.32 J1.3@-10549,10938.32
  LAY6 w3.8: v3(-11070,10969) -11069,10968 -11029,10968 -11014,10953 -10660,10953 -10635.86,10977.14 v3(-10602.08,10977.14)
  BOTTOM w4: U1.A21@-11839.02,11029.98 -11839.02,11014.44 -11732.58,10908 -11678.25,10908 -11601.25,10831 -11584,10831 -11561,10808 -11363,10808 -11207,10964 -11075,10964 v3(-11070,10969) ; R78.2@-10618.79,10977.14 v3(-10602.08,10977.14)
SD_D0: D13.2 J1.7 R74.2 U1.A22 | length 1517.2
  TOP w4: D13.2@-10618.79,10815.04 -10617.04,10815.04 v3(-10604,10802) -10597,10802 -10589,10794 -10589,10785 -10569.09,10765.09 J1.7@-10549,10765.09
  LAY6 w3.8: v3(-11725,10937) -11707,10919 -11707,10871 -11693,10857 -11671.99,10857 -11655.99,10873 -11516.38,10873 -11460.58,10817.2 -11140.2,10817.2 -11116,10793 -10874,10793 -10838.6,10757.6 -10659.4,10757.6 -10615,10802 v3(-10604,10802)
  BOTTOM w4: U1.A22@-11819.34,11029.98 -11819.34,11018.98 -11781.06,10980.7 -11757,10980.7 -11729.53,10953.23 -11729.53,10941.53 v3(-11725,10937) ; R74.2@-10618.79,10815.04 -10617.04,10815.04 v3(-10604,10802)
SD_D1: D9.2 J1.8 R73.2 U1.B21 | length 1641.9
  TOP w4: D9.2@-10618.79,10777.74 -10605.74,10777.74 v3(-10605,10777) -10605,10773 -10590,10758 -10590,10730 -10581.78,10721.78 J1.8@-10549,10721.78
  LAY6 w3.8: v3(-11755,10954) -11755,10924 -11736,10905 -11736,10853 -11713,10830 -11637,10830 -11612.65,10854.35 -11525.66,10854.35 -11467.31,10796 -11282.01,10796 -11258.01,10772 -10891,10772 -10861,10742 -10640,10742 -10623,10725 -10603,10725 -10588,10740 -10588,10757 -10605,10774 v3(-10605,10777)
  BOTTOM w3.2: U1.B21@-11839.02,11049.66 -11829.14,11039.78 -11829.14,11019.16 -11778.98,10969 -11773,10969 -11758,10954 v3(-11755,10954)
  BOTTOM w4: R73.2@-10618.79,10777.74 -10605.74,10777.74 v3(-10605,10777)
SD_D2: D17.2 J1.1 R77.2 U1.C21 | length 1547.6
  TOP w4: D17.2@-10618.79,11052.04 v3(-10602.08,11052.04) -10602.08,11040.08 -10586.93,11024.93 J1.1@-10549,11024.93
  LAY6 w3.8: v3(-11818.8,11067.21) -11804.59,11053 -11698.99,11053 -11649.99,11004 -11586.35,11004 -11582.89,11007.46 -11481.47,11007.46 -11433.01,10959 -11224,10959 -11207,10942 -11090.27,10942 -11078.27,10930 -10650,10930 -10640,10940 -10592,10940 -10574,10958 -10574,11023.96 v3(-10602.08,11052.04)
  BOTTOM w4: U1.C21@-11839.02,11069.35 -11820.94,11069.35 v3(-11818.8,11067.21) ; R77.2@-10618.79,11052.04 v3(-10602.08,11052.04)
SD_D3: D16.2 J1.2 R76.2 U1.D22 | length 1424.8
  TOP w4: v3(-10623,11015.24) D16.2@-10619.75,11015.24 ; D16.2@-10618.79,11014.28 D16.2@-10619.75,11015.24 ; J1.2@-10549,10981.63 -10584.63,10981.63 -10618.24,11015.24 D16.2@-10619.75,11015.24
  LAY6 w3.8: -11697,11075.6 -11625.98,11075.6 -11618.18,11067.8 -11572.71,11067.8 -11535.77,11030.86 -11463.48,11030.86 -11427.62,10995 -11014,10995 -10997,10978 -10676.01,10978 -10638.77,11015.24 v3(-10623,11015.24)
  LAY6 w4: v3(-11798.2,11068.11) -11814,11083.91 -11814,11097 -11802,11109 -11789,11109 -11755.6,11075.6 -11697,11075.6
  BOTTOM w4: U1.D22@-11819.34,11089.04 -11811.56,11081.26 -11805.87,11075.56 -11805.65,11075.56 v3(-11798.2,11068.11) ; v3(-10623,11015.24) -10619.75,11015.24 R76.2@-10618.79,11014.28
SD_PWR_EN: D50.2 U1.B14 | length 1610.6
  LYR3 w3.8: v10(-10829,10681.3) -10810,10662.3 -10810,10566 -10823,10553 v1(-10823,10547)
  LAY6 w3.8: v3(-11931.4,10946.93) -11916.47,10932 -11851,10932 -11798,10879 -11787,10879 -11779,10871 -11779,10815.99 -11752.01,10789 -11565.01,10789 -11564.81,10788.8 -11564.07,10788.8 -11522.17,10746.9 -11335.9,10746.9 -11304.5,10715.5 -11135.58,10715.5 -11120.08,10700 -10847.7,10700 v10(-10829,10681.3)
  BOTTOM w3.2: U1.B14@-11976.82,11049.66 -11986.7,11039.78 -11986.7,11007.14 -11990,11003.84 -11990,10994.16 -11986.7,10990.86 -11986.7,10983.69 -11968.86,10965.85 -11964.83,10965.85 -11963.98,10965 -11948,10965 -11933,10950 -11933,10948.53 v3(-11931.4,10946.93)
  BOTTOM w4: v1(-10823,10547) -10816.2,10547 -10802.2,10533 -10773.05,10533 D50.2@-10760,10519.95
SD_VOLT_SEL: R54.2 R55.1 U1.C17 U17.12 | length 2014.3
  TOP w4: v1(-12500.85,9635.85) -12500.85,9629.78 R55.1@-12505.5,9625.13 R54.2@-12468.5,9625.13
  LYR3 w3.8: v1(-12500.85,9635.85) -12482,9617 -12286.96,9617 -12148.19,9755.77 -12148.19,9906.73 -12090.8,9964.12 -12090.8,10038.2 -12031.8,10097.2 -12031.8,10209.52 -11883.2,10358.12 -11883.2,10452.46 -11818.8,10516.86 -11818.8,10812.8 -11867,10861 -11867,10999 -11899.58,11031.58 v1(-11899.58,11068.68)
  BOTTOM w4: v1(-12500.85,9635.85) U17.12@-12500.85,9681.31 ; U1.C17@-11917.76,11069.35 -11900.25,11069.35 v1(-11899.58,11068.68)
SOC_EMU0: J19.7 R157.2 U1.E12 | length 1596.7
  TOP w4: J19.7@-12799,10619 -12799,10592 v3(-12798,10591)
  LYR3 w3.8: v1(-11998.21,11111.98) -11998,11111.77 -11998,11109.93 -11985.1,11097.03 -11985.1,11080.89 -11989.92,11076.07 -11989.92,11047.92 -11909,10967 -11909,10880 -11948,10841 -11948,10708 -11965,10691 v10(-11965,10528)
  LAY6 w3.8: v3(-12798,10591) -12798,10574 -12739,10515 -11978,10515 v10(-11965,10528)
  BOTTOM w4: R157.2@-12799.14,10570.45 -12798,10571.59 v3(-12798,10591) ; U1.E12@-12016.18,11108.72 -12014.38,11110.52 -12001.48,11110.52 -12000.02,11111.98 v1(-11998.21,11111.98)
SOC_EMU1: J19.10 R156.2 U1.C11 | length 1024.4
  TOP w4: v3(-12649.14,10589.86) -12649,10590 J19.10@-12649,10619
  LYR3 w3.8: v10(-12292.86,10589.86) -12292.86,10631.14 -12285,10639 -12285,10756 -12115,10926 -12115,11011.51 v1(-12057.16,11069.35)
  LAY6 w3.8: v3(-12649.14,10589.86) -12624.28,10565 -12317.72,10565 v10(-12292.86,10589.86)
  BOTTOM w4: R156.2@-12649.14,10569.97 v3(-12649.14,10589.86) ; v1(-12057.16,11069.35) U1.C11@-12035.87,11069.35
SOC_TCK: J19.4 R154.2 U1.A10 | length 1260
  TOP w4: J19.4@-12799,10669 -12797,10669 v3(-12781,10685)
  LYR3 w3.8: v10(-12193,10602) -12159,10636 -12159,10677 -12020.48,10815.52 -12007.48,10815.52 v1(-11998,10825)
  LAY6 w3.8: v3(-12781,10685) -12718,10685 -12612,10579 -12335,10579 -12294,10620 -12211,10620 v10(-12193,10602)
  BOTTOM w4: R154.2@-12798.86,10684.01 -12781.99,10684.01 v3(-12781,10685) ; U1.A10@-12055.56,11029.98 -12055.56,10994.56 -12053,10992 -12053,10943 -12039,10929 -12004,10929 -12000,10925 -12000,10840.5 -11998,10838.5 v1(-11998,10825)
SOC_TDI: J19.8 R151.2 U1.A11 | length 1330.8
  TOP w4: v3(-12760,10571) -12749,10582 J19.8@-12749,10619
  LYR3 w3.8: v10(-12158,10545) -12145,10558 -12145,10678 -12022,10801 -12000,10801 v1(-11965,10836)
  LAY6 w3.8: v3(-12760,10571) -12718,10529 -12174,10529 v10(-12158,10545)
  BOTTOM w3.2: U1.A11@-12035.87,11029.98 -12039,11026.85 -12039,10968.49 -12038.2,10967.69 -12038.2,10949.14 -12034.06,10945 -11994.22,10945 -11972.6,10923.38 -11972.6,10843.6 v1(-11965,10836)
  BOTTOM w4: v3(-12760,10571) -12759.45,10570.45 R151.2@-12741.14,10570.45
SOC_TDO: J19.6 U1.D12 | length 1319.6
  TOP w4: v3(-12850,10586) -12849,10587 J19.6@-12849,10619 ; v5(-12035.99,11087.63) -12032,11083.64 -12032,10969.72 -12031.96,10969.68 -12031.96,10967.95 -12005.14,10941.13 -12005.14,10857.86 v1(-12018.5,10844.5)
  LYR3 w3.8: v10(-12234,10603) -12224.52,10612.48 -12224.52,10624.48 -12022,10827 -12022,10827.6 -12018.5,10831.1 v1(-12018.5,10844.5)
  LAY6 w3.8: v3(-12850,10586) -12831,10605 -12755,10605 -12694,10544 -12293,10544 v10(-12234,10603)
  BOTTOM w4: v5(-12035.99,11087.63) -12034,11087.63 -12032.59,11089.04 U1.D12@-12016.18,11089.04
SOC_TMS: J19.2 R155.2 U1.B11 | length 1324.1
  TOP w4: J19.2@-12699,10669 -12693,10669 v3(-12678,10684)
  LYR3 w3.8: v10(-12112,10580) -12112,10695 -12034.38,10772.62 -11979.38,10772.62 v1(-11965,10787)
  LAY6 w3.8: v3(-12678,10684) -12678,10659 -12609,10590 -12340,10590 -12300,10630 -12163,10630 -12122.48,10589.48 -12121.48,10589.48 v10(-12112,10580)
  BOTTOM w3.2: U1.B11@-12035.87,11049.66 -12045.67,11039.86 -12045.67,10983.67 -12045.4,10983.4 -12045.4,10946.15 -12037.05,10937.8 -11999.8,10937.8 -11995.13,10933.13
  BOTTOM w4: R155.2@-12695.86,10684.37 -12695.49,10684 v3(-12678,10684) ; -11995.13,10933.13 -11986,10924 -11986,10837 -11965,10816 v1(-11965,10787)
SOC_TRST#: J19.9 R158.1 U1.B10 | length 1070.4
  TOP w4: J19.9@-12699,10619 -12699,10593 v3(-12696,10590)
  LYR3 w3.8: v10(-12272,10604) -12272,10753.6 -12096,10929.6 v1(-12096,10943)
  LAY6 w3.8: v3(-12696,10590) -12661,10555 -12307,10555 -12272,10590 v10(-12272,10604)
  BOTTOM w3.2: -12069.59,10943 -12062,10950.59 -12062,10988 -12065.36,10991.36 -12065.36,11039.86 U1.B10@-12055.56,11049.66
  BOTTOM w4: v3(-12696,10590) -12696,10570.59 R158.1@-12695.86,10570.45 ; v1(-12096,10943) -12069.59,10943
SPE_INTN: R110.2 U1.AE22 U13.21 | length 1100.5
  TOP w4: v5(-11704,11592) -11699,11587 -11091,11587 -10984,11480 -10984,11447.01 v5(-10959.92,11422.93)
  BOTTOM w4: U1.AE22@-11819.34,11502.42 -11819.34,11536.05 -11761.69,11593.7 -11705.7,11593.7 v5(-11704,11592) ; U13.21@-10987,11395.85 -10968.16,11395.85 -10959.92,11404.09 v5(-10959.92,11422.93)
  BOTTOM w10: R110.2@-11029.14,11390.85 -11024.14,11395.85 U13.21@-10987,11395.85
SPE_RSTN: D53.2 U1.AC21 | length 1162.2
  LAY6 w3.8: v3(-11687,11608.7) -11682.3,11608.7 -11662,11629 -11626,11629 -11592,11595 -11060.01,11595 -11009.76,11645.25 -10867.25,11645.25 v3(-10856,11634)
  BOTTOM w3.2: U1.AC21@-11839.02,11463.05 -11829.22,11472.85 -11829.22,11512.92
  BOTTOM w4: -11829.22,11512.92 -11829.22,11539.48 -11804.69,11564.01 -11804.69,11564.32 -11760.31,11608.7 v3(-11687,11608.7) ; v3(-10856,11634) -10846,11624 D53.2@-10828.48,11624
SPE_RX_D2: R115.1 U13.14 | length 132.3
  BOTTOM w4: R115.1@-10976.14,11218.37 -10989,11231.23 -10989,11251 -10980,11260 -10931,11260 -10917.55,11273.45 U13.14@-10917.55,11287
SPE_TX_D0: R96.1 U13.24 | length 372.4
  BOTTOM w4: R96.1@-11310,11544.56 -11072.56,11544.56 -11008,11480 -11008,11458.99 -11003.96,11454.95 U13.24@-10987,11454.95
SPE_TX_D1: R95.1 U13.25 | length 739.6
  BOTTOM w4: R95.1@-11613.92,11505.56 -11378.44,11505.56 -11369,11515 -11369,11546 -11356,11559 -11065,11559 -11029,11523 -10975,11523 -10956.95,11504.95 U13.25@-10956.95,11485
SPE_TX_EN: R97.1 U13.23 | length 383.1
  BOTTOM w4: R97.1@-11310,11519.56 -11293,11536.56 -11085.56,11536.56 -11016,11467 -11016,11448 -11003.25,11435.25 U13.23@-10987,11435.25
SPI2_CLK: D43.2 J21.12 U1.A20 | length 1069
  TOP w4: v3(-11267,10640.95) -11265.95,10642 -11250.3,10642 -11245.42,10646.88 D43.2@-11245.42,10672 -11249.39,10675.97 J21.12@-11249.39,10781.91
  LAY6 w3.8: v3(-11672,10718) -11603.31,10718 -11549.51,10664.2 -11361.19,10664.2 -11337.99,10641 v3(-11267,10640.95) v3(-11267,10640.95)
  BOTTOM w4: U1.A20@-11858.7,11029.98 -11858.7,11012.4 -11811,10964.7 -11811,10930.99 -11840,10901.99 -11840,10789 -11788,10737 -11689,10737 -11672,10720 v3(-11672,10718)
SPI2_CS0: D44.2 J21.11 U1.E19 | length 794.1
  TOP w4: J21.11@-11349.39,10781.91 -11349.39,10858.39 v3(-11351,10860) -11340.79,10870.21 D44.2@-11340.79,10931
  LAY6 w3.8: -11706.66,10964.7 -11657.96,10916 -11505.92,10916 -11456.92,10867 -11358,10867 v3(-11351,10860)
  LAY6 w4: v3(-11876.89,11090.68) -11778.31,10992.1 -11734.07,10992.1 -11714.47,10972.51 -11706.66,10964.7
  BOTTOM w4: U1.E19@-11878.39,11108.72 -11878.39,11092.18 v3(-11876.89,11090.68)
SPI2_D0: D42.2 J21.13 U1.B19 | length 1196.3
  TOP w4: v3(-11188,10641) -11183,10646 -11183,10655 D42.2@-11166,10672 -11149.39,10688.61 J21.13@-11149.39,10781.91
  LAY6 w3.8: v3(-11698,10715) -11686,10703 -11605,10703 -11554.4,10652.4 -11366.08,10652.4 -11338.68,10625 -11204,10625 v3(-11188,10641)
  BOTTOM w3.2: U1.B19@-11878.39,11049.66 -11868.5,11039.77 -11868.5,11011.2 -11819,10961.7 -11819,10938.7
  BOTTOM w4: -11819,10938.7 -11819,10935.99 -11848,10906.99 -11848,10776 -11800,10728 -11712,10728 -11699,10715 v3(-11698,10715)
SPI2_D1: D41.2 J21.14 U1.A19 | length 1328.3
  TOP w4: v3(-11052.28,10635) -11034.61,10652.67 D41.2@-11034.61,10672 -11049.39,10686.78 J21.14@-11049.39,10781.91
  LAY6 w3.8: v3(-11727.57,10713.43) -11709.14,10695 -11612,10695 -11561.6,10644.6 -11369.32,10644.6 -11341.52,10616.8 -11070.48,10616.8 v3(-11052.28,10635)
  BOTTOM w4: U1.A19@-11878.39,11029.98 -11878.39,11007.09 -11827,10955.7 -11827,10939.99 -11856,10910.99 -11856,10770 -11799.43,10713.43 v3(-11727.57,10713.43)
TP_INT_1V8: J8.35 R243.1 U1.K25 | length 3414.6
  TOP w4: v3(-12764,12208) -12738.43,12182.43 J8.35@-12738.43,12148.55
  LYR3 w3.8: v10(-11907,12171) -11831,12171 -11815,12187 -11434,12187 -11358.2,12111.2 -11358.2,12010.24 -11273,11925.04 -11273,11677.2 -11249,11653.2 -11249,11598.16 -11132.4,11481.56 -11132.4,11414.48 -11112.4,11394.48 -11112.4,11350.4 -11095.7,11333.7 v1(-11095.7,11305)
  LAY6 w3.8: v3(-12764,12208) -12729,12243 -12658.66,12243 -12577.18,12161.52 -11916.48,12161.52 v10(-11907,12171)
  BOTTOM w4: U1.K25@-11760.28,11207.14 -11725.48,11207.14 -11719.99,11212.63 -11638.51,11212.63 -11562.66,11136.78 -11562.66,11114.52 -11517.14,11069 -11167,11069 -11124,11112 -11124,11227 -11095.7,11255.3 v1(-11095.7,11305)